# EAGLE board tinypico-fc (EAGLE 9.1.1)
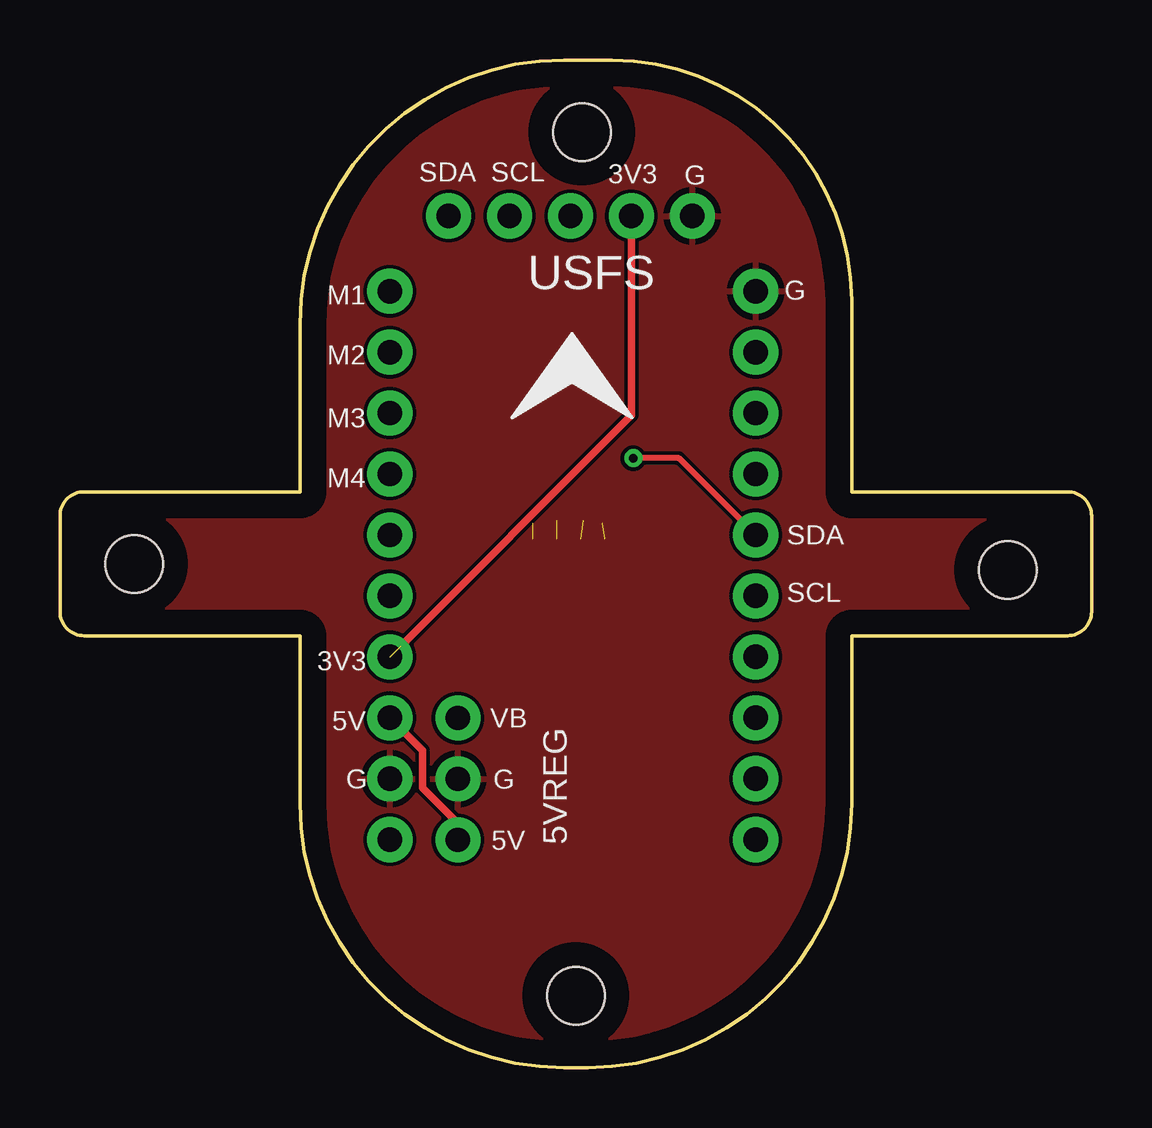
[diagram p0: board, top side]
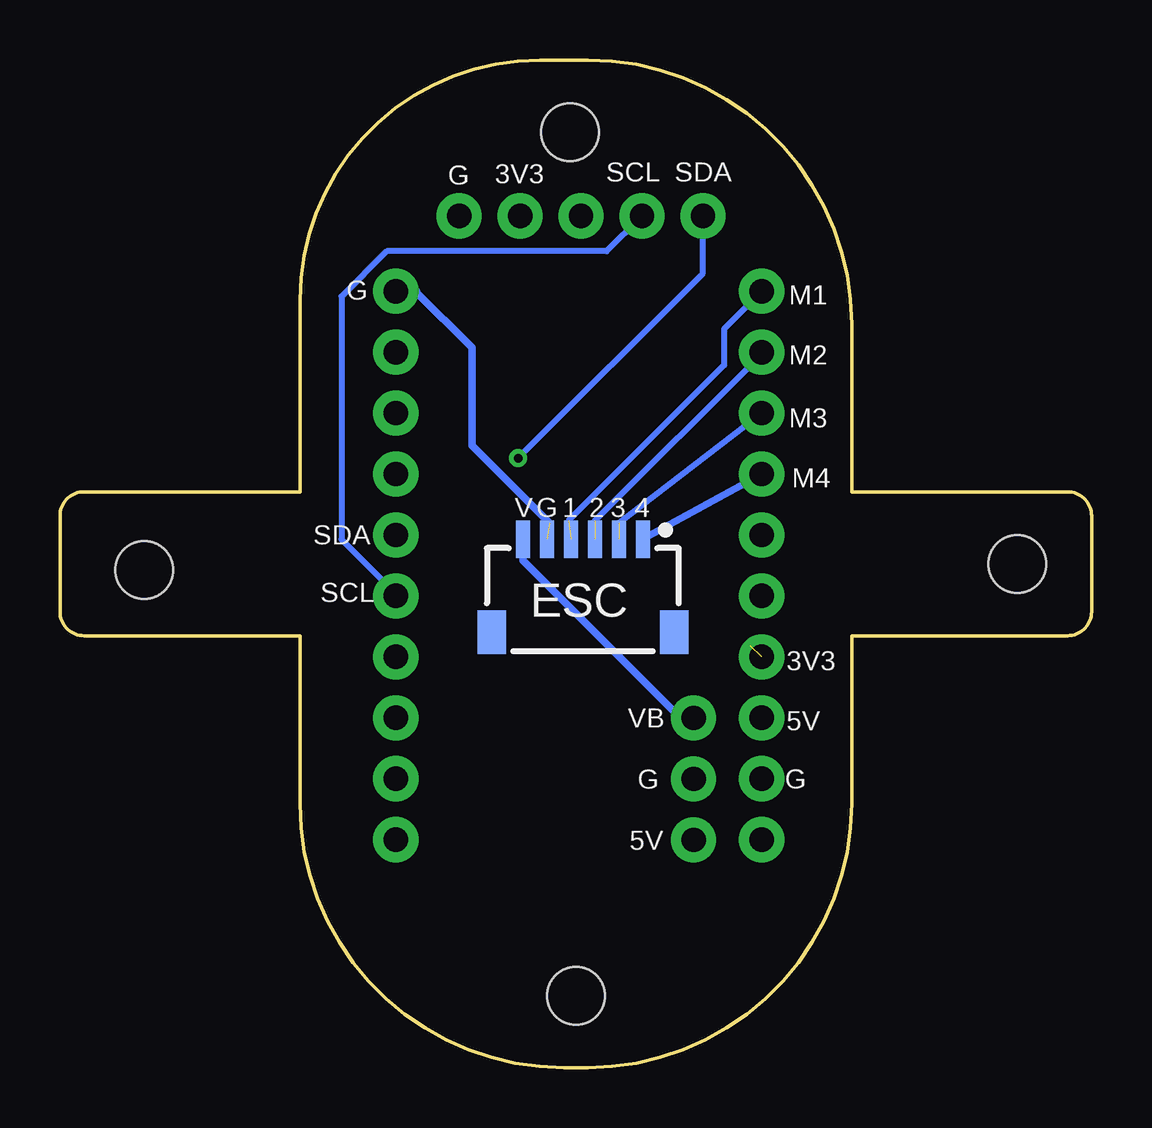
[diagram p1: board, bottom side, seen from below]

Size 43 x 42 mm. Coordinates in mm from the lower left corner, seen from the top.
Outline: 33,18 33,11 arc-90 22,0 21,0 arc-90 10,11 10,18 1,18 arc-90 0,19 0,23 arc-90 1,24 10,24 10,31 arc-90 21,42 23,42 arc-90 33,32 33,24 42,24 arc-90 43,23 43,19 arc-90 42,18 33,18
Copper layers (1*16): Top 0.035mm / dielectric 1.5mm / Bottom 0.035mm
Design rules "default": minimum track width 6mil, minimum drill 0.35mm, track to track 6mil, track to pad 6mil, pad to pad 6mil, via to via 6mil, smd to smd 6mil, copper to edge 40mil, drill to drill 6mil, minimum pad ring 10mil, minimum via ring 8mil, stop-mask expansion 4mil, vias tented up to drill 0mil, thermal gap 10mil
Holes 2.4 mm at 3.1,21 39.5,20.75 21.5,3 21.75,39

## Footprints (pad centres in the part's own frame; a part is rotated, then mirrored left to right if it is on the bottom)
1X03_NO_SILK = drill 1.016 pad 1.88: 1 0,0; 2 2.54,0; 3 5.08,0
JST-6-SMD-HORI-1.0MM = smd 0.6 x 1.55: 1 -2.5,-4.775; 2 -1.5,-4.775; 3 -0.5,-4.775; 4 0.5,-4.775; 5 1.5,-4.775; 6 2.5,-4.775 | smd 1.2 x 1.8: M1 -3.8,-0.9; M2 3.8,-0.9
1X10_NO_SILK = drill 1.016 pad 1.88: 1 0,0; 2 2.54,0; 3 5.08,0; 4 7.62,0; 5 10.16,0; 6 12.7,0; 7 15.24,0; 8 17.78,0; 9 20.32,0; 10 22.86,0
1X05_NO_SILK = drill 1.016 pad 1.88: 1 0,0; 2 2.54,0; 3 5.08,0; 4 7.62,0; 5 10.16,0

## Placement (x,y rotation side)
5VREG  [1X03_NO_SILK]  16.59,9.49 90 top
ESC  BM06B-SRSS-TB  [JST-6-SMD-HORI-1.0MM]  21.2,17.25 180 bottom
TP1  [1X10_NO_SILK]  13.75,9.5 90 top
TP2  [1X10_NO_SILK]  29,9.5 90 top
USFS  [1X05_NO_SILK]  16.2,35.5 0 top

## Library data of the parts
5VREG TP1 TP2 USFS = SparkFun-Connectors
ESC = SparkFun-Connectors; PROD_ID: XXX-00000

## Nets
3V3: TP1.4 USFS.4
5V: 5VREG.1 TP1.3
GND: 5VREG.2 ESC.5 TP1.2 TP2.10 USFS.5
M1: ESC.4 TP1.10
M2: ESC.3 TP1.9
M3: ESC.2 TP1.8
M4: ESC.1 TP1.7
SCL: TP2.5 USFS.2
SDA: TP2.6 USFS.1
VBAT: 5VREG.3 ESC.6

## Tracks (layer width: path | path; a pad name or v marks a point on that pad's centre or on a via)
3V3  (1 unrouted)
  Top 0.152: 14.21,17.58
  Top 0.305: TP1.4 23.82,27.19 USFS.4
5V
  Top 0.305: TP1.3 15.12,13.21 15.12,11.65 16.59,10.18 5VREG.1
GND  (1 unrouted)
  Bottom 0.305: 22.6,22.7 25.83,25.93 25.83,30 28.19,32.36
  Bottom 0.406: TP2.10 28.19,32.36
  pour Top: 19,44 44,44 44,-2 44,-6 0,-6 0,44
M1  (1 unrouted)
  Bottom 0.254: 21.8,22.8 15.32,29.28 15.32,30.79 TP1.10
M2  (1 unrouted)
  Bottom 0.254: TP1.9 13.75,29.75 20.7,22.8
M3  (1 unrouted)
  Bottom 0.254: TP1.8 19.7,22.7
M4
  Bottom 0.305: TP1.7 ESC.1
SCL
  Bottom 0.152: 29,19.75 TP2.5
  Bottom 0.254: 29,19.75 31.27,22.02 31.27,32.14 29.38,34.03 20.21,34.03 USFS.2
SDA  (via drill 0.35)
  Top 0.254: TP2.6 25.8,25.4 v23.9,25.4
  Bottom 0.254: v23.9,25.4 16.2,33.1 USFS.1
VBAT
  Bottom 0.305: 5VREG.3 17.14,14.57 23.7,21.13 ESC.6

## Text on the board
tPlace: USFS
bPlace: ESC | SCL
tNames: SDA | SCL | 3V3 | G | M1 | G | M2 | M3 | M4 | SDA | SCL | 3V3 | 5V | VB | 5VREG | G | G | 5V
bNames: SDA | SCL | 3V3 | G | M1 | G | M2 | M3 | M4 | 4 | 3 | 2 | 1 | G | V | SDA | 3V3 | 5V | VB | G | G | 5V